# Altium PCB bangmach.PcbDoc
Units mm, origin at the board's own origin, x right, y up, seen from the top; angles counter-clockwise.
Board outline 112.01 x 94.64 mm, 2 copper layers (Top Layer, Bottom Layer), stack 1.535 mm thick; 50 components, 66 nets, 240 pads, 149 vias.
Unrouted connection lines stored in the file: 4.
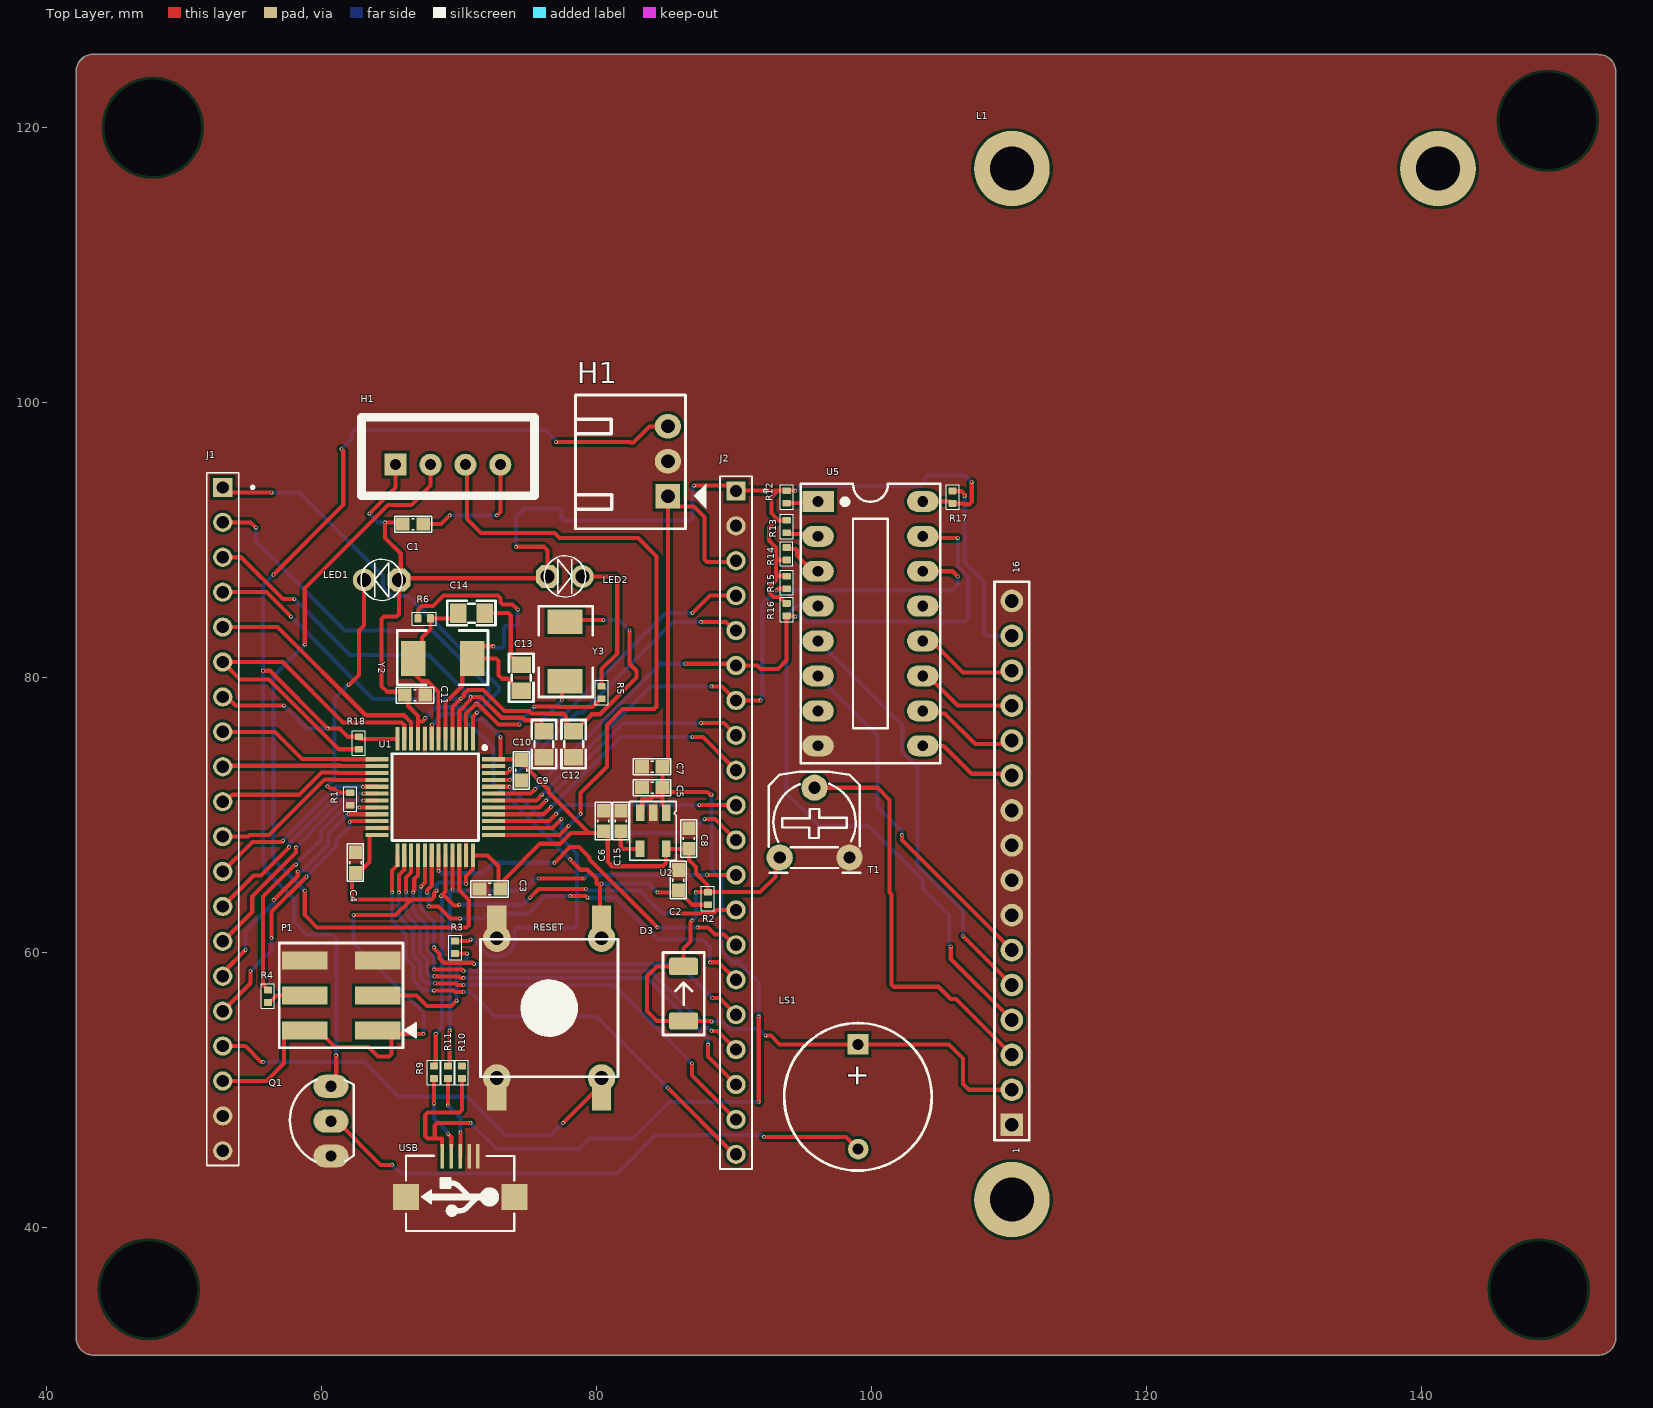
[diagram p0: Top Layer view]
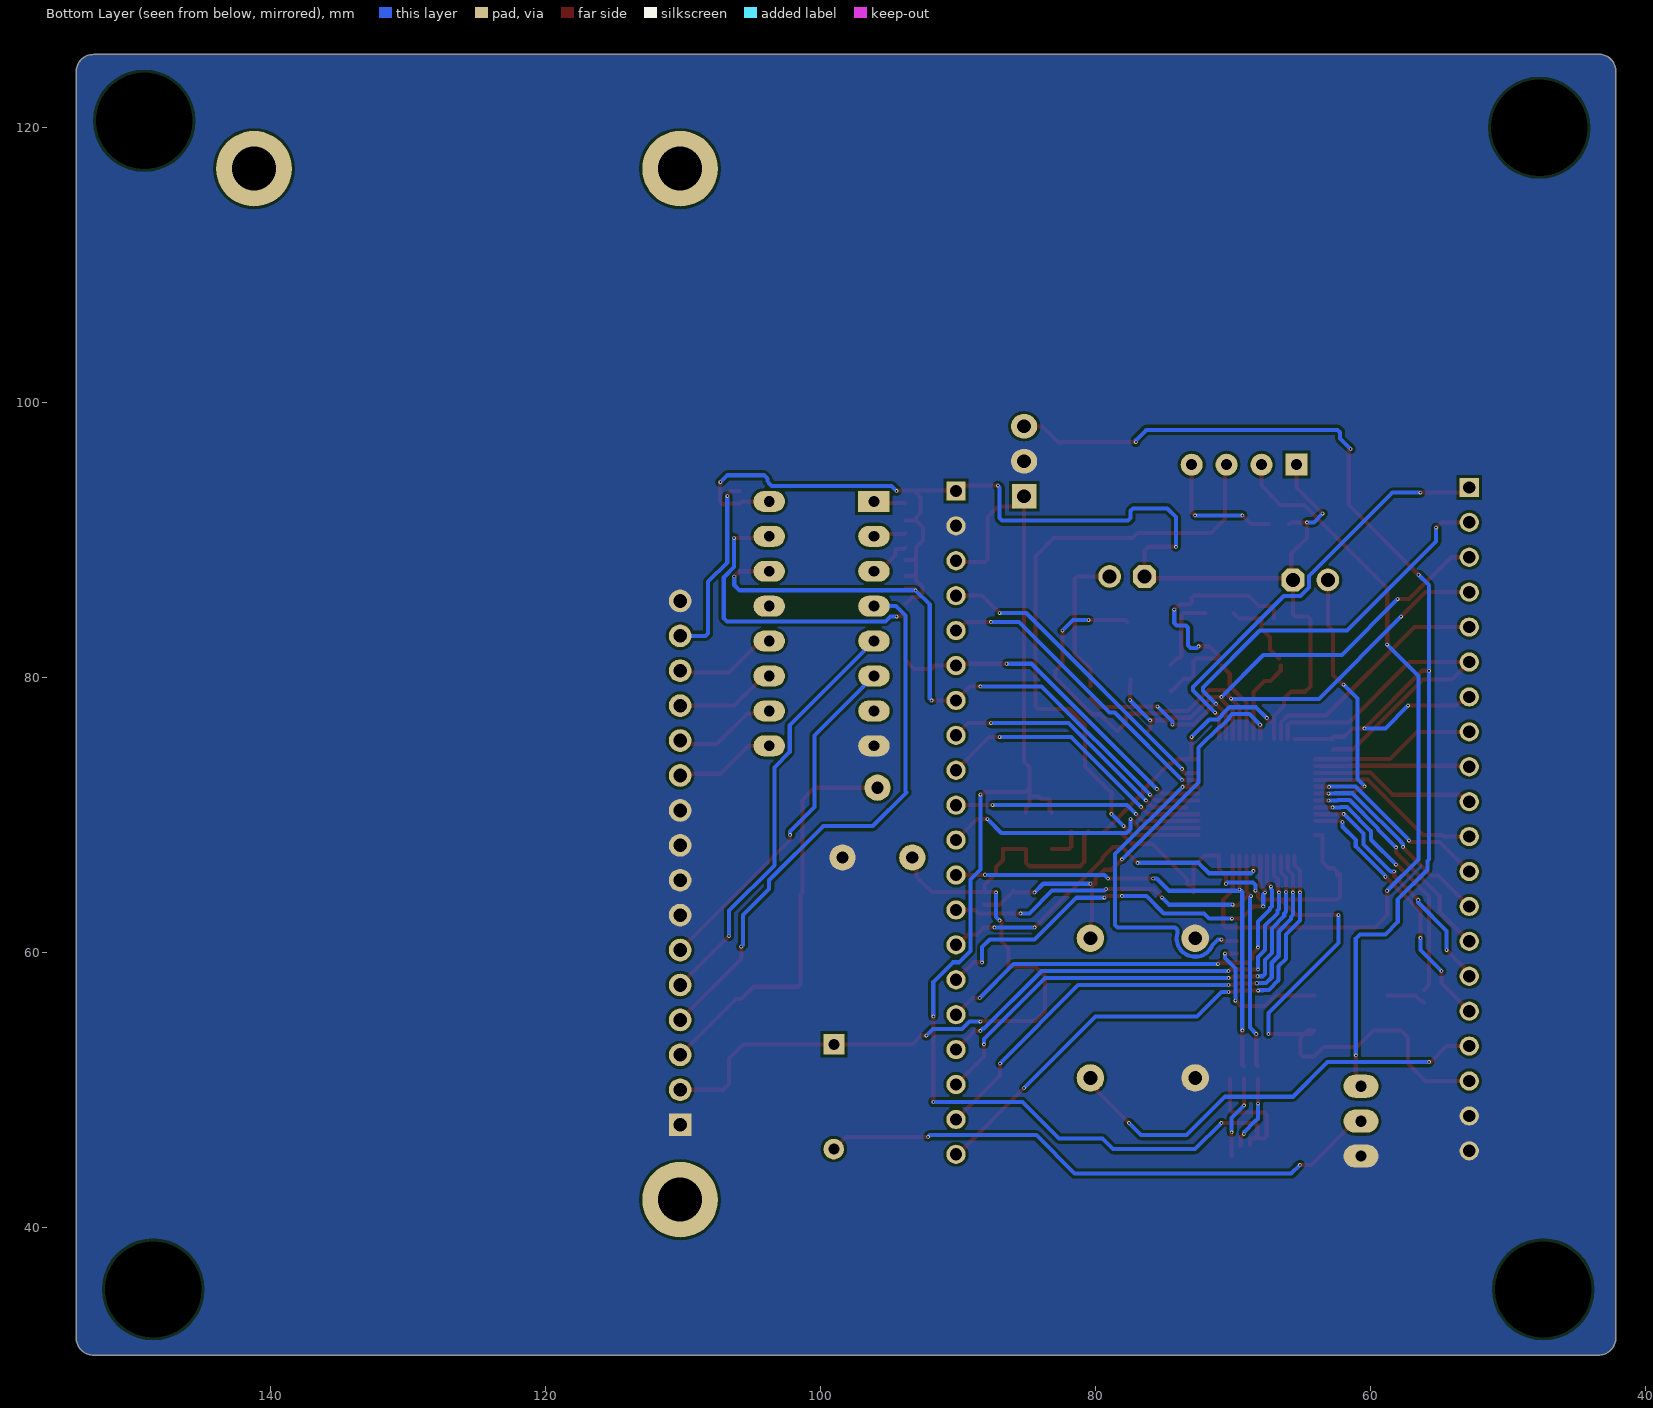
[diagram p1: Bottom Layer view, seen from below]
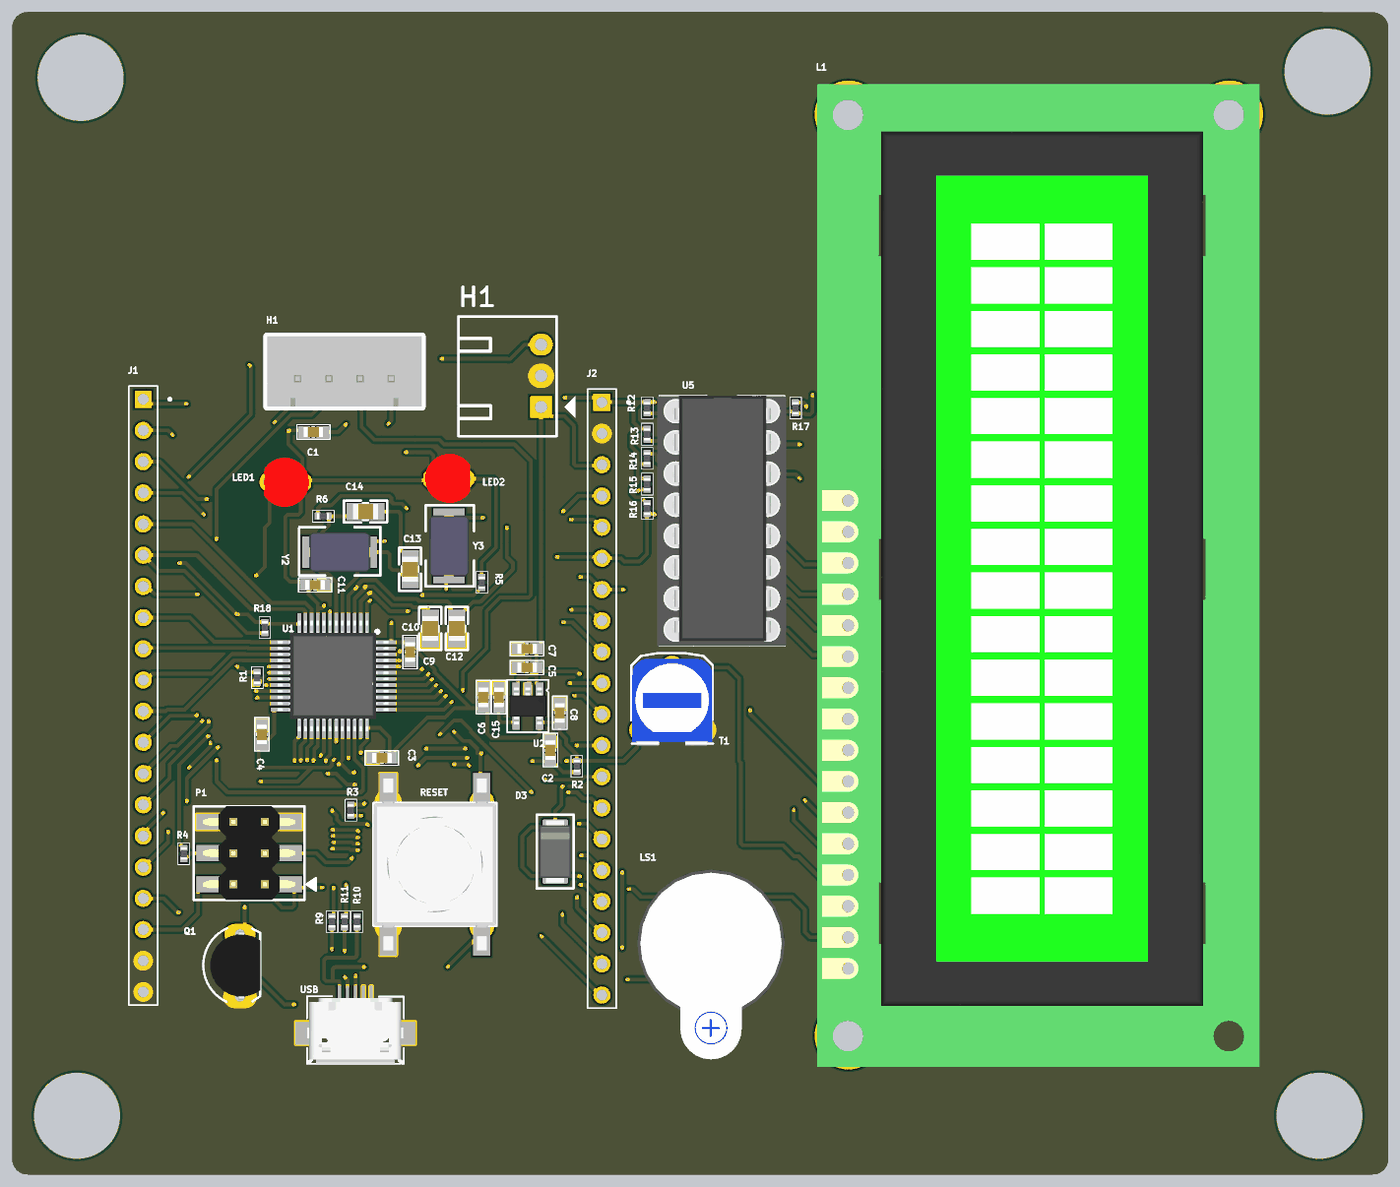
[diagram p2: 3D render of the assembled board from above, using the file's embedded part models]

## Layer stack, top to bottom
Top Solder: solder mask 0.0254, SM-001, Dk 4
Top Layer: signal copper 0.035
Dielectric 1: core 1.465, Core-043, Dk 4.3
Bottom Layer: signal copper 0.035
Bottom Solder: solder mask 0.0254, SM-001, Dk 4

## Board outline
42.164,32.004 ccw(c43.434,32.004) 43.434,30.734 152.908,30.734 ccw(c152.908,32.004) 154.178,32.004 154.178,124.079 ccw(c152.908,124.079) 152.908,125.349 148.844,125.349 ccw(c148.816,125.349) 148.816,125.377 43.434,125.377 ccw(c43.434,124.107) 42.164,124.107

## Design rules (kind name [scope] priority, off if disabled: settings)
Clearance [All] p1: gap=0.2 ignorepadtopadclearanceinfootprint=FALSE
PlaneConnect [All] p1: planeconnectstyle=Direct reliefexpansion=0.508 reliefentries=4 reliefconductorwidth=0.254 reliefairgap=0.254
PolygonConnect [All] p1: connectstyle=Direct reliefconductorwidth=0.254 reliefentries=4 polygonreliefangle="90 Angle" airgapwidth=0.254
RoomDefinition schematic [InComponentClass('schematic')] p1: confinementstyle=ConfineIn formatcopy=TRUE lockcomponents=FALSE outline 0,0 50.8,0 50.8,25.4 0,25.4
RoutingVias [All] p1: holewidth=0.15 width=0.25 viastyle="Through Hole" minholewidth=0.15 minwidth=0.25 maxholewidth=0.15 maxwidth=0.25
ShortCircuit [All] p1: allowed=TRUE
SolderMaskExpansion [All] p1: expansion=0.102 istentingtop=FALSE
UnRoutedNet [All] p1: checkbadconnections=TRUE
Width [All] p1: maxlimit=1 minlimit=0.3 preferedwidth=0.4 minimp=50.000000 maximp=50.000000 favimp=50.000000
27 further rules are at their usual default settings.

## Components (designator, comment, footprint, x,y, rotation, side; value= is the part's Value field where it differs from the comment)
C1 "104" "tu 0603" 66.675,91.186 r0 top
C2 "105" "tu 0603" 85.979,65.278 r90 top
C3 "104" "tu 0603" 72.263,64.643 r180 top
C4 "104" "tu 0603" 62.484,66.56 r90 top
C5 "105" "tu 0603" 84.074,72.009 r180 top
C6 "106" "tu 0603" 80.518,69.584 r90 top
C7 "104" "tu 0603" 84.074,73.533 r180 top
C8 "104" "tu 0603" 86.741,68.314 r90 top
C9 "20pF" "tu 0805" 76.2,75.184 r270 top
C10 "104" "tu 0603" 74.549,73.279 r270 top
C11 "104" "tu 0603" 66.814,78.74 r0 top
C12 "20pF" "tu 0805" 78.359,75.184 r270 top
C13 "20p" "tu 0805" 74.549,80.01 r90 top
C14 "20p" "tu 0805" 70.923,84.712 r0 top
C15 "223" "tu 0603" 81.788,69.584 r90 top
D3 "1N4007" "DO-214AC-2 (SMA)" 86.36,57.023 r90 top
H1 "IR Sensor" "Header 3P DC 2.54" 85.217,93.218 r180 top
H1 "SWD" XH2.54M-4 65.405,95.504 r0 top
J1 "2-87220-0" TE_2-87220-0 52.832,69.723 r270 top
J2 "2-87220-0" TE_2-87220-0 90.17,69.469 r270 top
L1 "LCD16x2" "LCD16X2_3 HOLES" 107.696,39.498 r90 top
LED1 "LED 3mm" LED-3MM-RED 65.659,87.122 r180 top
LED2 "LED 3mm" LED-3MM-RED 76.454,87.376 r0 top
LS1 "Coi báo" "Coi Chip Speacker" 99.047,53.34 r270 top
P1 "95278-101A06LF" HDR_M_2X3_2.54_SMD 61.451,56.896 r90 top
Q1 "C1815" TO92 60.706,47.752 r90 top value=C9014
R1 "510" "RES 0402" 62.103,71.194 r270 top
R2 "10k" "RES 0402" 88.138,63.955 r90 top
R3 "100k" "RES 0402" 69.723,60.399 r270 top
R4 "100k" "RES 0402" 56.134,56.843 r90 top
R5 "510" "RES 0402" 80.391,78.941 r270 top
R6 "1M" "RES 0402" 67.49,84.328 r180 top
R9 "20" "RES 0402" 68.199,51.308 r90 top
R10 "4.7K" "RES 0402" 70.231,51.308 r90 top
R11 "20" "RES 0402" 69.215,51.308 r90 top
R12 "10K" "RES 0402" 93.853,93.165 r270 top
R13 "10K" "RES 0402" 93.853,91.006 r270 top
R14 "10K" "RES 0402" 93.853,89.027 r90 top
R15 "10K" "RES 0402" 93.853,86.942 r270 top
R16 "10K" "RES 0402" 93.853,84.963 r270 top
R17 "330" "RES 0402" 105.918,93.144 r270 top
R18 "4.7K" "RES 0402" 62.738,75.258 r90 top
RESET "5ESH935" SW_5ESH935 76.581,55.98 r0 top
T1 "10K" "Bien Tro Tam Giac Dung" 93.345,66.929 r0 top
U1 "STM32F103C8T6" LQFP-48_19.6_393_58X11_SMD 68.29,71.327 r270 top
U2 "RT9193-33GB" SOT23-5 84.137,68.874 r180 top
U5 "PCF8574" DIP16 96.139,92.837 r270 top
USB "USB Micro 5p SMD" "USB Micro 5p SMD" 70.104,45.212 r180 top
Y2 "8Mhz" "Thach Anh 2 chan SMD5032" 68.834,81.407 r0 top value=4Mhz
Y3 "32.768K" "Thach Anh 2 chan SMD5032" 77.724,81.915 r270 top value=4Mhz

## Footprints (in the part's own frame and the unit in brackets; to place one, negate y for a bottom-side part, rotate by r counter-clockwise, add the part's x,y. Pads: shape width x height; smd on the part's side, far side on the other; paste and mask are expansions set on the pad)
"Bien Tro Tam Giac Dung" [mil] "RM065"
  round 75 hole 35: 1(0,0) 2(100,200) 3(200,0)
  silkscreen extent -31,-44 231,246, body extent -28,-50 228,228, height 279
"Coi Chip Speacker" [mm]
  rect 1.5x1.5 hole 0.8: 1(0,0)
  round 1.5 hole 0.8: 2(7.62,0.013)
  silkscreen extent -1.55,-5.38 9.18,5.36, body extent -2.22,-6 13.24,6, height 4.5
DIP16 [mil] "16 PIN, W 300mil, Pin to pin 100mil"
  rect 60x90 hole 31: 1(0,0)
  oval 60x90 hole 31: 2(100,0) 3(200,0) 4(300,0) 5(400,0) 6(500,0) 7(600,0) 8(700,0) 9(700,300) 10(600,300) 11(500,300) 12(400,300) 13(300,300) 14(200,300) 15(100,300) 16(0,300)
  silkscreen extent -50,-50 750,350, body extent -52,-57 752,356, height 299
"DO-214AC-2 (SMA)" [mm]
  rrect25% 1.27x2.1 smd: A(-1.985,0) K(1.985,0)
  silkscreen extent -3,-1.5 3,1.5, body extent -2.6,-1.3 2.6,1.3, height 2.42
HDR_M_2X3_2.54_SMD [mm]
  rect 1.3x3.3 smd: 1(-2.54,-2.65) 2(-2.54,2.65) 3(0,-2.65) 4(0,2.65) 5(2.54,-2.65) 6(2.54,2.65)
  silkscreen extent -3.81,-5.43 3.81,4.5, body extent -3.81,-3.75 3.81,3.75, height 9.75
"Header 3P DC 2.54" [mil]
  rect 70x70 hole 39.37 unplated: 1(0,0)
  oval 75x70 hole 39.37 unplated: 2(0,-100) 3(0,-200)
  silkscreen extent -110,-290 265,93
"LCD16X2_3 HOLES" [mm] "LCD 16x2"
  rect 1.65x1.65 hole 1: 1(8,-2.54)
  round 1.65 hole 1: 2(10.54,-2.54) 3(13.08,-2.54) 4(15.62,-2.54) 5(18.16,-2.54) 6(20.7,-2.54) 7(23.24,-2.54) 8(25.78,-2.54) 9(28.32,-2.54) 10(30.86,-2.54) 11(33.4,-2.54) 12(35.94,-2.54) 13(38.48,-2.54) 14(41.02,-2.54) 15(43.56,-2.54) 16(46.1,-2.54)
  round 5.5 hole 3.2 paste+0: ""(2.54,-2.54) ""(77.54,-2.54)
  round 5.5 hole 3.2: ""(77.54,-33.54)
  silkscreen extent 6.86,-3.81 47.5,-1.27, body extent 0,-36 80,0, height 17
LED-3MM-RED [mil]
  oct 65x65 hole 40: 1(0,0)
  round 65 hole 40: 2(100,0)
  silkscreen extent -9,-59 109,59, body extent -27,-77 117,80, height 181
LQFP-48_19.6_393_58X11_SMD [mm] "48LQFP"
  rect 1.7x0.3 smd mask+0.076: 1(-4.238,2.75) 2(-4.238,2.25) 3(-4.238,1.75) 4(-4.238,1.25) 5(-4.238,0.75) 6(-4.238,0.25) 7(-4.238,-0.25) 8(-4.238,-0.75) 9(-4.238,-1.25) 10(-4.238,-1.75) 11(-4.238,-2.25) 12(-4.238,-2.75) 25(4.238,-2.75) 26(4.238,-2.25) 27(4.238,-1.75) 28(4.238,-1.25) 29(4.238,-0.75) 30(4.238,-0.25) 31(4.238,0.25) 32(4.238,0.75) 33(4.238,1.25) 34(4.238,1.75) 35(4.238,2.25) 36(4.238,2.75)
  rect 0.3x1.7 smd mask+0.076: 13(-2.75,-4.238) 14(-2.25,-4.238) 15(-1.75,-4.238) 16(-1.25,-4.238) 17(-0.75,-4.238) 18(-0.25,-4.238) 19(0.25,-4.238) 20(0.75,-4.238) 21(1.25,-4.238) 22(1.75,-4.238) 23(2.25,-4.238) 24(2.75,-4.238) 37(2.75,4.238) 38(2.25,4.238) 39(1.75,4.238) 40(1.25,4.238) 41(0.75,4.238) 42(0.25,4.238) 43(-0.25,4.238) 44(-0.75,4.238) 45(-1.25,4.238) 46(-1.75,4.238) 47(-2.25,4.238) 48(-2.75,4.238)
  silkscreen extent -3.72,-3.15 3.15,3.73, body extent -4.5,-4.5 4.5,4.5, height 1.7
"RES 0402" [mm]
  rrect20% 0.49x0.6 smd: 1(-0.455,0) 2(0.455,0)
  silkscreen extent -0.89,-0.46 0.89,0.48, body extent -0.47,-0.25 0.53,0.25, height 0.32
SOT23-5 [mm] "CASE: SOT"
  rect 0.62x1.22 smd mask+0.076: 1(-0.953,-1.31) 2(-0.003,-1.31) 3(0.947,-1.31) 4(0.952,1.31) 5(-0.953,1.31)
  silkscreen extent -1.69,-2.14 1.69,2.14, body extent -1.5,-1.5 1.5,1.5, height 1.41
SW_5ESH935 [mm]
  rect 1.4x2.4 smd: 1(-3.81,6.25) 2(-3.81,-6.25) 3(3.81,6.25) 4(3.81,-6.25)
  round 2 hole 1: 1(-3.81,5.08) 2(-3.81,-5.08) 3(3.81,5.08) 4(3.81,-5.08)
  silkscreen extent -5,-5 5,5, body extent -5,-7 5,7, height 6.37
TE_2-87220-0 [mm]
  rect 1.398x1.398 hole 0.89: 1(-24.13,0)
  round 1.398 hole 0.89: 2(-21.59,0) 3(-19.05,0) 4(-16.51,0) 5(-13.97,0) 6(-11.43,0) 7(-8.89,0) 8(-6.35,0) 9(-3.81,0) 10(-1.27,0) 11(1.27,0) 12(3.81,0) 13(6.35,0) 14(8.89,0) 15(11.43,0) 16(13.97,0) 17(16.51,0) 18(19.05,0) 19(21.59,0) 20(24.13,0)
  silkscreen extent -25.2,-1.17 25.2,2.27
"Thach Anh 2 chan SMD5032" [mil] "DO-214-AA/SMB; 2 C-Bend Leads; Body 5.3 x 3.6 mm, inc. leads (LxW)"
  rect 70x100 smd: 1(-85,0) 2(85,0)
  silkscreen extent -130,-75 130,80, body extent -98,-63 98,63, height 51
TO92 [mil] "TO-92"
  oval 66x100 hole 32: 1(-100,0) 2(0,0) 3(100,0)
  silkscreen extent -117,-65 120,118, body extent -109,-66 109,95, height 245
"tu 0603" [mm] "Chip Capacitor, 2-Leads, Body 1,60x0,80mm, IPC Medium Density"
  rect 1x0.95 smd mask+0.076: 1(-0.75,0) 2(0.75,0)
  silkscreen extent -1.35,-0.58 1.37,0.58, body extent -0.8,-0.4 0.8,0.4, height 0.9
"tu 0805" [mm] "Compoment SMD 80x50mil"
  rect 1.2x1.4 smd: 1(-0.946,-0.003) 2(0.954,-0.003)
  silkscreen extent -1.75,-0.89 1.75,0.89, body extent -1.01,-0.64 1.01,0.63, height 0.61
"USB Micro 5p SMD" [mil]
  rect 10x70 smd: 1(51.18,0) 2(25.59,0) 3(0,0) 4(-25.59,0) 5(-50,0)
  rect 74.8x74.8 smd: 5(-155.51,116.84) 5(155.51,116.84)
  silkscreen extent -155,-1 155,215, body extent -157,5 158,218, height 107
XH2.54M-4 [mm]
  rect 1.6x1.6 hole 0.8: 1(0,0)
  round 1.6 hole 0.8: 2(2.54,0) 3(5.08,0) 4(7.62,0)
  silkscreen extent -2.48,-2.26 10.1,3.46, body extent -2.48,-2.26 10.1,3.48, height 6.91

## Part data
C1 C2 C5 C6 C7 C8 C9 C12 C13 C14 C15: library part "Tu 0402 220nF 6.3V 20%", "Dán", Chung_Loai=Dán, Don_Vi=Con, Ma_Hang=MH008102, So_Chan=2, Ten_Linh_Kien="Tụ 0402 220nF 6.3V 20%"
C3 C4 C10 C11: library part "Tu 0603 104 50V 10%", "Dán", Chung_Loai=Dán, Don_Vi=Con, Ma_Hang=MH004568, So_Chan=2, Ten_Linh_Kien="Tụ 0603 104-100nF 10% 50V"
D3: library part D_SMA, "Diode SMD SMA (DO-214AA)"
H1: library part "Header 3P 2.54 Duc Cong", "Cắm", Chung_Loai=Cắm, Don_Vi=Con, Ma_Hang=MH001302, Ten_Linh_Kien="Header 3P XH2.54-3P Đực Cong"
H1: library part "Header 4P 2.54 Duc Thang", "Cắm", Chung_Loai=Cắm, Don_Vi=Con, Ma_Hang=MH001285, Ten_Linh_Kien="Header 4P XH2.54-4P Đực Thẳng"
J1 J2: Package=None, Availability=Warning, Centerline_Pitch="2.54 mm[.1 in]", EU_RoHS_Compliance=Compliant, MF="TE Connectivity", MP=2-87220-0, Number_of_Positions=20, Price=None, Product_Type=Connector, Purchase-URL=https://pricing.snapeda.com/search/part/2-87220-0/?ref=eda, SnapEDA_Link=https://www.snapeda.com/parts/2-87220-0/TE%20Connectivity%20AMP%20Connectors/view-part/397035/?ref=snap
L1: "Character LCD 16x2"
LED1 LED2: library part "LED 3mm Do", "Cắm", Chung_Loai=Cắm, Don_Vi=Con, Ma_Hang=MH003892, Ten_Linh_Kien="Led 3MM Phủ Đỏ (10c)"
LS1: library part "Coi Chip Speaker", "Còi chip"
P1: library part HDR_M_95278-101A06LF, "BERGSTIK HDR 6POS .100\" DR SMT", Current Rating=-, Insulation Color=Black, Manufacturer="Amphenol FCI", Material Flammability Rating="UL94 V-0", Supplier Part Number 1=609-3487-6-ND, Applications=-, Category="Connectors, Interconnects", ComponentLink1Description=http://cdn.amphenol-icc.com/media/wysiwyg/files/drawing/95278.pdf, ComponentLink1URL=http://cdn.amphenol-icc.com/media/wysiwyg/files/drawing/95278.pdf, Connector Type=Header, Contact Finish - Mating="Gold, GXT™", Contact Finish - Post=Tin, Contact Finish Thickness - Mating="30µin (0.76µm)", Contact Finish Thickness - Post="78.7µin (2.00µm)", Contact Length - Mating="0.232\" (5.90mm)", Contact Length - Post=-, Contact Material="Phosphor Bronze", Contact Shape=Square, Contact Type="Male Pin", Fastening Type=Push-Pull, Features="Pick and Place", Ingress Protection=-, Insulation Height="0.100\" (2.54mm)", Insulation Material=Thermoplastic, Manufacturer Part Number=95278-101A06LF, Mated Stacking Heights=-, Mounting Type="Surface Mount", Number of Positions=6, Number of Positions Loaded=All, Number of Rows=2, Operating Temperature=-, Overall Contact Length=-, Packaging=Digi-Reel®, Part Status=Active, Pitch - Mating="0.100\" (2.54mm)", Pricing 1="1=1.09, 10=0.96, 100=0.8284 (USD)", RoHS="RoHS Compliant", Row Spacing - Mating="0.100\" (2.54mm)", Shrouding=Unshrouded, Stock 1=11648, Style="Board to Board", Supplier 1=Digi-Key, Termination=Solder, Voltage Rating=-
Q1: library part "Trans C1815 DIP", "NPN transistor"
R1 R3 R4 R5 R6 R9 R10 R11 R12 R13 R14 R15 R16 R17 R18: library part "RES 0402", "RES SMD 0402", Manufacturer="Vishay Dale", Manufacturer Part Number=CRCW040210K0FKED, Operating Temperature="-55°C ~ 155°C", Package / Case="0402 (1005 Metric)", Power (Watts)="0.063W, 1/16W", Resistance (Ohms)=10k, Supplier Part Number 1=541-10.0KLCT-ND, Temperature Coefficient=±100ppm/°C, Tolerance=±1%, Category=Resistors, ComponentLink1Description=http://www.vishay.com/docs/20035/dcrcwe3.pdf, ComponentLink1URL=http://www.vishay.com/docs/20035/dcrcwe3.pdf, Composition="Thick Film", Features="Automotive AEC-Q200", Height="0.016\" (0.40mm)", Number of Terminations=2, Packaging="Cut Tape (CT)", Pricing 1="10=0.083, 50=0.0444, 200=0.0255, 1000=0.0174 (USD)", RoHS="RoHS Compliant", Size / Dimension="0.039\" L x 0.020\" W (1.00mm x 0.50mm)", Stock 1=2392462, Supplier 1=Digi-Key, Supplier Device Package="0402 (1005 Metric)"
R2: library part "RES 0402", "RES SMD 0402", Manufacturer="Vishay Dale", Manufacturer Part Number=CRCW040210K0FKED, Operating Temperature="-55°C ~ 155°C", Package / Case="0402 (1005 Metric)", Power (Watts)="0.063W, 1/16W", Supplier Part Number 1=541-10.0KLCT-ND, Temperature Coefficient=±100ppm/°C, Tolerance=±1%, Category=Resistors, ComponentLink1Description=http://www.vishay.com/docs/20035/dcrcwe3.pdf, ComponentLink1URL=http://www.vishay.com/docs/20035/dcrcwe3.pdf, Composition="Thick Film", Features="Automotive AEC-Q200", Height="0.016\" (0.40mm)", Number of Terminations=2, Packaging="Cut Tape (CT)", Pricing 1="10=0.083, 50=0.0444, 200=0.0255, 1000=0.0174 (USD)", Resistance (Ohms)=10k, RoHS="RoHS Compliant", Size / Dimension="0.039\" L x 0.020\" W (1.00mm x 0.50mm)", Stock 1=2392462, Supplier 1=Digi-Key, Supplier Device Package="0402 (1005 Metric)"
RESET: library part SW_5ESH935, "SWITCH TACTILE SPST-NO 0.05A 24V", Contact Rating @ Voltage="0.05A @ 24VDC", Illumination Type, Color=-, Manufacturer 1="MEC Switches", Operating Force=350gf, Operating Temperature="-40°C ~ 160°C", Supplier Part Number 1=679-2579-ND, Actuator Height off PCB, Vertical=6.40mm, Actuator Length, Right Angle=-, Actuator Material="Polyphenylene Sulfide (PPS)", Actuator Orientation="Top Actuated", Actuator Type="Plunger for Cap", Category 1=Switches, Circuit=SPST-NO, ComponentLink1Description=http://www.mec.dk/files/MEC/brochures/MEC_ProductCatalogueno7_multimec-5-series-switches.pdf, ComponentLink1URL=http://www.mec.dk/files/MEC/brochures/MEC_ProductCatalogueno7_multimec-5-series-switches.pdf, Description 1="SWITCH TACTILE SPST-NO 0.05A 24V", Features="Sealed - Flux Protection", Illumination=Non-Illuminated, Illumination Voltage (Nominal)=-, Ingress Protection="IP67 - Dust Tight, Waterproof", Manufacturer Part Number 1=5ESH935, Mechanical Life="10,000,000 Cycles", Mounting Type="Surface Mount", Outline="10.10mm x 10.10mm", Packaging=Tube, Part Status=Active, Pricing 1="1=2.68, 10=2.575, 25=2.3692, 50=2.06, 100=1.957, 250=1.90552, 500=1.854, 1000=1.442, 5000=1.339 (USD)", RoHS 1="RoHS Compliant", Stock 1=0, Supplier 1=Digi-Key, Switch Function=Off-Mom, Switch Travel=1.00mm, Termination Style="Gull Wing"
T1: library part "Bien tro tam giac 100K Dung", "Cắm", Chung_Loai=Cắm, Don_Vi=Con, Ma_Hang=MH003711, Ten_Linh_Kien="Biến Trở Tam Giác 104-100K RM065"
U1: library part IC_STM32F103C8T6, "ARM® Cortex®-M3 STM32F1 Microcontroller IC 32-Bit 72MHz 64KB (64K x 8) FLASH 48-LQFP (7x7)", Alternate Part Number-1=NA, Case/Package=LQFP48, Manufacturer=STMicroelectronics, Manufacturer Part Number=STM32F103C8T6, Supplier Part Number-1=STM32F103C8T6, Supplier-1=LCSC
U2: library part REG_5.5V-3.3V-0.3A-1W-SOT-23-5, "Linear Voltage Regulator IC 1 Output 300mA SOT-23-5", Alternate Part Number-1=NA, Case/Package=SOT-23-5, Manufacturer="Richtek USA Inc.", Supplier Part Number-1=C15651, Manufacturer Part Number=RT9193-33GB, Supplier-1=LCSC
U5: "I2C PORT EXPANDER", Frequency - Clock=100KHz, Manufacturer="NXP Semiconductors", Manufacturer Part Number=PCF8574T/3,512, Operating Temperature="-40°C ~ 85°C", Package / Case="16-SOIC (7.5mm Width)", Supplier Part Number=568-1076-5-ND, Voltage - Supply="2.5 V ~ 6 V", Category="Integrated Circuits (ICs)", Includes=POR, Interface=I²C, Interrupt Output=Yes, Number of I /O=8, Packaging=Tube, RoHS="RoHS Compliant", Supplier=Digi-Key, Supplier 1=Digi-Key, Supplier Part Number 1=568-1076-5-ND
USB: "USB Type B", Ma_Hang=MH001020, Ten="MicroUSB MK5P SMD"
Y2 Y3: library part "Thach Anh 2 chan SMD 5032", "Crystal For all Crystal 2pin."

## Free pads (board coordinates)
  round 1.524 hole 7: 1(47.444,35.513) 1(47.737,120.012) 1(148.571,35.513) 1(149.225,120.523)

## Via types
v1: diameter 0.25, hole 0.15, Top Layer to Bottom Layer, 149 vias

## Nets (pads, with @x,y where several pads share a name; then routed paths per layer and width w, separated by ;. In a path a pad name is that pad's centre, name@x,y a point inside that pad or via, vN(x,y) a via of type N, cw(c..) or ccw(c..) an arc to the next point about the centre after c; other vN are vias at no path point)
5V: C5.1 C7.1 H1.1@85.217,93.218 J2.3 R10.1 U2.1 U2.3 USB.1 | length 97.7
  Top Layer w0.3: USB.1@68.791,46.021 68.791,46.459 68.768,46.482 68.254,46.482 ; R10.1 70.231,48.563 70.055,48.387 67.74,48.387 67.564,48.211 67.564,46.658 67.74,46.482 68.254,46.482 ; v1(70.866,47.625) 68.43,47.625 68.254,47.449 68.254,46.482 ; U2.3 83.35,70.344 83.35,71.173 83.361,71.184 83.969,71.184 84.164,71.38 84.824,71.38 ; U2.1 85.09,70.484 84.824,70.75 84.824,71.38 ; v1(88.392,71.501) 88.265,71.501 88.082,71.684 85.149,71.684 C5.1 ; J2.3 90.086,88.435 88.06,88.435 87.884,88.611 87.884,91.694 87.099,92.479 85.956,92.479 85.217,93.218 85.217,74.034 85.174,73.991 85.174,73.858 84.849,73.533 C7.1 C5.1 ; v1(91.821,49.149) v1(91.821,55.372) ; 84.824,71.38 C5.1
  Bottom Layer w0.3: v1(70.866,47.625) 72.771,45.72 78.74,45.72 79.502,46.482 82.677,46.482 85.344,49.149 v1(91.821,49.149) ; v1(88.392,71.501) 88.392,66.057 89.121,65.328 89.121,60.144 89.956,59.309 90.384,59.309 91.821,57.872 v1(91.821,55.372)
BOOT0: R3.1 U1.44 | length 24.3
  Top Layer w0.3: R3.1 70.76,60.854 v1(70.866,60.96) ; U1.44 v1(73.681,72.077)
  Bottom Layer w0.3: v1(70.866,60.96) 71.12,60.96 71.515,60.565 ccw(c72.771,61.06) 74.06,61.461 cw(c74.347,61.549) 74.249,61.833 74.297,61.849 78.429,61.849 78.517,61.937 78.605,62.025 78.605,67.174 73.702,72.077 v1(73.681,72.077)
BOOT1: R4.2 U1.20 | length 18.3
  Top Layer w0.3: R4.2 56.079,57.298 55.984,57.393 55.984,57.448 55.753,57.679 55.753,64.08 58.094,66.421 v1(58.166,66.421) ; v1(62.774,70.576) 62.775,70.577 U1.20
  Bottom Layer w0.3: v1(58.166,66.421) 59.967,68.222 59.967,68.838 61.734,70.604 62.183,70.604 62.211,70.576 v1(62.774,70.576)
D0: C2.2 C3.2 C4.2 C5.2 C6.2 C7.2 C8.2 C9.2 C10.2 C11.2 C12.2 C15.2 H1.2@85.217,95.758 J1.19 J1.20 J2.2 L1.1 L1.7 L1.8 L1.9 L1.10 L1.16 P1.5 P1.6 Q1.1 R1.2 RESET.1 RESET.2 T1.3 U1.8 U1.23 U1.35 U1.47 U2.2 U5.8 USB.4 USB.5
D4: L1.11 U5.9 | length 7.4
  Top Layer w0.3: U5.9 105.283,75.057 107.315,73.025 110.109,73.025 L1.11
D5: L1.12 U5.10 | length 7.6
  Top Layer w0.3: U5.10 103.955,77.401 105.352,77.401 107.572,75.181 109.979,75.181 L1.12
D6: L1.13 U5.11 | length 7.4
  Top Layer w0.3: U5.11 104.14,80.137 106.299,77.978 L1.13
D7: L1.14 U5.12 | length 7.5
  Top Layer w0.3: U5.12 104.394,82.677 106.68,80.391 110.109,80.391 L1.14
E: L1.6 U5.6 | length 25.8
  Top Layer w0.3: v1(102.235,68.58) 102.235,68.199 L1.6
  Bottom Layer w0.3: U5.6 96.189,80.137 96.754,79.572 96.754,79.522 100.457,75.819 100.457,70.612 102.235,68.834 v1(102.235,68.58)
LED+: L1.15 R17.1 | length 13.8
  Top Layer w0.3: R17.1 106.553,93.599 106.807,93.345 v1(106.807,93.218)
  Bottom Layer w0.3: v1(106.807,93.218) 106.807,88.392 108.204,86.995 108.204,83.234 108.38,83.058 L1.15
NetC13_2: C13.2 C14.2 | length 5.8
  Top Layer w0.3: C14.2@72.009,84.709 73.611,84.709 73.787,84.533 73.787,81.59 73.963,81.414 74.102,81.414 C13.2
NetC15_1: C15.1 U2.4 | length 2.6
  Top Layer w0.3: C15.1 81.788,67.74 81.964,67.564 U2.4
NetLED1_2: LED1.2 R1.1 | length 17.8
  Top Layer w0.3: v1(60.44,72.104) 60.489,72.104 60.643,71.95 60.938,71.95 61.239,71.649 R1.1 ; v1(61.976,79.502) 62.039,79.502 62.738,80.2 62.738,83.439 63.119,83.82 LED1.2
  Bottom Layer w0.3: 60.55,72.248 60.96,72.659 60.96,78.486 v1(61.976,79.502)
NetLED2_2: LED2.2 R5.1 | length 10.9
  Top Layer w0.3: LED2.2 81.358,87.376 81.534,87.2 81.534,81.788 80.391,80.645 R5.1
NetLS1_2: LS1.2 Q1.2 | length 41.5
  Top Layer w0.3: Q1.2 61.138,47.752 64.313,44.577 v1(65.151,44.577) ; v1(92.202,46.609) 98.171,46.609 LS1.2
  Bottom Layer w0.3: v1(65.151,44.577) 65.786,43.942 81.534,43.942 84.328,46.736 92.075,46.736 v1(92.202,46.609)
NetP1_3: P1.3 R3.2 | length 10.9
  Top Layer w0.3: P1.3 66.04,56.896 66.043,56.899 66.291,56.899 66.294,56.896 66.929,56.896 67.691,56.134 69.469,56.134 v1(69.85,56.515) ; R3.2 v1(70.612,59.944)
  Bottom Layer w0.3: v1(69.85,56.515) 69.842,56.523 69.842,58.865 70.612,59.635 v1(70.612,59.944)
NetP1_4: P1.4 R4.1 | length 2.9
  Top Layer w0.3: R4.1 56.229,56.483 56.33,56.483 56.743,56.896 P1.4
NetQ1_3: H1.3@85.217,98.298 J1.7 Q1.3 R18.2 U1.12 | length 98.1
  Top Layer w0.3: J1.7 53.129,78.613 53.764,77.978 v1(57.277,77.978) ; v1(55.753,80.518) 56.269,80.518 v1(60.46,76.327) 61.341,76.327 61.955,75.713 R18.2 ; v1(56.515,87.503) 61.595,92.583 61.595,96.52 v1(61.468,96.647) ; Q1.3 61.087,50.673 v1(61.087,52.545) ; R18.2@62.803,75.565 U1.12 ; v1(77.089,97.155) 82.425,97.155 82.458,97.122 82.706,97.122 83.882,98.298 H1.3@85.217,98.298
  Bottom Layer w0.3: v1(56.515,87.503) 55.753,86.741 v1(55.753,80.518) 55.753,66.802 55.88,66.675 55.88,66.04 58.039,63.881 58.039,62.23 58.928,61.341 60.784,61.341 61.087,61.038 v1(61.087,52.545) ; v1(57.277,77.978) 58.928,76.327 v1(60.46,76.327) ; v1(61.468,96.647) 62.23,97.409 62.23,97.868 62.406,98.044 76.327,98.044 77.089,97.282 v1(77.089,97.155)
NetR9_1: R9.1 USB.2 | length 5.3
  Top Layer w0.3: v1(68.199,49.022) R9.1 ; v1(69.228,46.816) 69.454,46.59 USB.2@69.454,45.951
  Bottom Layer w0.3: v1(68.199,49.022) 68.199,47.928 68.375,47.752 68.419,47.752 69.228,46.943
NetR11_1: R11.1 USB.3 | length 5.9
  Top Layer w0.3: v1(69.215,48.895) R11.1 ; USB.3 70.117,45.225 v1(70.117,46.943)
  Bottom Layer w0.3: v1(69.215,48.895) 70.117,47.993 70.117,47.07
NetR12_2: R12.2 U5.1 | length 2.3
  Top Layer w0.3: R12.2 96.012,92.71 U5.1
NetR13_2: R13.2 U5.2 | length 2.4
  Top Layer w0.3: R13.2 93.948,90.456 95.98,90.456 U5.2
NetR14_2: R14.2 U5.3 | length 3.2
  Top Layer w0.3: R14.2 93.948,89.387 94.509,89.387 94.614,89.282 94.614,88.901 95.758,87.757 U5.3
NRST: C2.1 J1.17 R2.1 RESET.3 RESET.4 U1.7 | length 64.6
  Top Layer w0.3: J1.17 54.483,53.213 55.626,52.07 v1(55.753,52.07) ; U1.7 v1(68.04,76.589) ; v1(77.597,47.625) 77.615,47.643 79.906,49.934 79.906,49.955 80.37,50.419 80.391,50.419 80.391,50.9 RESET.4@80.056,50.565 ; v1(78.105,66.802) 78.867,66.04 79.375,66.04 80.01,65.405 80.01,65.024 v1(80.391,65.024) ; 80.264,65.024 80.264,62.357 RESET.3@80.391,62.23 ; v1(84.455,64.389) 85.84,64.389 C2.1 85.979,64.503 86.982,63.5 R2.1
  Bottom Layer w0.3: v1(55.753,52.07) 55.778,52.045 63.144,52.045 65.659,49.53 70.358,49.53 70.361,49.533 70.609,49.533 70.738,49.404 73.406,46.736 76.708,46.736 v1(77.597,47.625) ; v1(68.04,76.589) 68.81,77.359 70.088,77.359 70.32,77.127 70.32,77.056 70.905,76.47 70.977,76.47 72.528,74.919 72.528,72.379 v1(78.105,66.802) ; v1(80.391,65.024) 83.82,65.024 v1(84.455,64.389)
OSCIN: C13.1 R6.2 U1.5 Y2.2 | length 26.4
  Top Layer w0.3: R6.2 67.035,84.942 67.31,85.217 68.136,85.217 68.898,85.979 72.849,85.979 73.025,85.803 73.025,85.52 73.201,85.344 73.914,85.344 v1(74.295,84.963) ; U1.5 69.04,78.201 70.254,79.415 70.254,80.287 Y2.2@70.866,80.899 ; v1(72.517,82.296) 71.732,82.296 70.993,81.557 Y2.2 72.722,81.407 72.898,81.231 72.898,80.186 73.145,79.939 73.578,79.939 74.452,79.064 C13.1
  Bottom Layer w0.3: v1(72.517,82.296) 72.644,82.169 73.103,82.169 73.279,82.345 73.279,83.644 73.455,83.82 74.119,83.82 74.295,83.996 v1(74.295,84.963)
OSCOUT: C14.1 R6.1 U1.6 Y2.1 | length 12.1
  Top Layer w0.3: Y2.1@66.548,80.899 66.548,80.518 67.287,79.779 67.729,79.779 68.54,78.968 68.54,78.261 U1.6 ; Y2.1 67.328,82.06 67.328,82.949 67.945,83.566 R6.1 69.596,84.328 C14.1
OUT: 
PA0: J1.5 U1.10 | length 17.8
  Top Layer w0.3: J1.5 56.824,83.693 63.237,77.28 66.027,77.28 66.54,76.767 66.54,76.541 U1.10
PA1: J1.6 R18.1 U1.11 | length 28.6
  Top Layer w0.3: R18.1 61.277,74.803 56.197,79.883 54.102,79.883 J1.6 57.198,81.153 61.586,76.765 65.835,76.765 66.04,76.56 U1.11
PA3: J1.8 U1.13 | length 12
  Top Layer w0.3: J1.8 56.642,76.073 58.611,74.104 61.571,74.104 61.598,74.077 U1.13
PA4: J1.9 U1.14 | length 11.3
  Top Layer w0.3: J1.9 52.903,73.604 61.364,73.604 61.391,73.577 U1.14
PA5: J1.10 U1.15 | length 12.1
  Top Layer w0.3: J1.10 53.049,70.993 53.557,71.501 58.423,71.501 60.026,73.104 61.157,73.104 61.184,73.077 U1.15
PA6: J1.11 U1.16 | length 13
  Top Layer w0.3: J1.11 54.665,68.453 54.784,68.572 56.201,68.572 60.233,72.604 60.95,72.604 60.977,72.577 U1.16
PA7: J1.12 U1.17 | length 13.8
  Top Layer w0.3: J1.12 54.991,68.072 57.134,68.072 v1(57.221,68.159) ; v1(63.033,72.077) U1.17
  Bottom Layer w0.3: v1(57.221,68.159) 57.221,68.215 60.635,71.629 60.637,71.629 61.112,72.104 63.006,72.104 v1(63.033,72.077)
PA8: J2.16 U1.29 | length 31.5
  Top Layer w0.3: v1(67.263,64.808) 67.263,64.829 67.54,65.106 U1.29 ; v1(68.204,60.393) 68.204,60.325 68.607,59.922 68.607,59.593 68.922,59.277 71.025,59.277 v1(71.12,59.182) ; v1(88.442,56.711) 88.958,56.711 J2.16
  Bottom Layer w0.3: v1(67.263,64.808) 67.263,64.651 67.192,64.58 67.192,63.381 67.318,63.255 67.318,63.166 68.204,62.28 v1(68.204,60.393) ; v1(71.12,59.182) 85.971,59.182 v1(88.442,56.711)
PA9: J2.15 U1.30 | length 30.5
  Top Layer w0.3: v1(67.692,64.373) 67.692,64.551 68.04,64.899 U1.30 ; v1(67.818,63.373) 68.517,63.373 69.406,62.484 v1(70.104,62.484) ; v1(78.105,64.135) 79.248,64.135 v1(79.375,64.008) ; v1(88.265,59.309) 88.9,59.309 J2.15
  Bottom Layer w0.3: v1(67.692,64.373) 67.818,64.247 v1(67.818,63.373) ; v1(70.104,62.484) 71.751,62.484 72.132,62.865 75.057,62.865 76.327,64.135 v1(78.105,64.135) ; v1(79.375,64.008) 81.407,64.008 84.455,60.96 87.716,60.96 88.265,60.411 v1(88.265,59.309)
PA10: J2.14 U1.31 | length 26.6
  Top Layer w0.3: v1(68.54,65.953) U1.31 ; v1(76.962,66.548) 78.105,67.691 78.74,67.691 79.502,66.929 79.502,66.802 83.82,62.484 v1(84.455,61.849) ; v1(87.376,61.849) 88.138,61.849 88.646,61.341 89.307,61.341 90.069,60.579 J2.14
  Bottom Layer w0.3: v1(68.54,65.953) 68.707,65.786 71.755,65.786 72.517,66.548 v1(76.962,66.548) ; v1(84.455,61.849) v1(87.376,61.849)
PA11: J2.13 R9.2 U1.32 | length 38.8
  Top Layer w0.3: R9.2 68.231,51.763 68.326,51.858 v1(68.326,54.102) ; v1(68.704,64.119) 68.704,64.134 69.04,64.47 U1.32 ; v1@68.725,64.135 68.961,64.135 69.662,63.434 69.974,63.434 v1(70.04,63.5) ; v1(75.184,64.008) 75.819,64.643 v1(79.248,64.643) ; v1(85.471,62.865) 88.514,62.865 88.768,63.119 J2.13
  Bottom Layer w0.3: v1(68.326,54.102) 68.793,54.569 68.793,64.029 v1(68.704,64.119) ; v1(70.04,63.5) 74.676,63.5 v1(75.184,64.008) ; v1(79.248,64.643) 79.367,64.524 83.177,64.524 84.836,62.865 v1(85.471,62.865)
PA12: J2.12 R10.2 R11.2 U1.33 | length 36.7
  Top Layer w0.3: R11.2 69.247,51.763 69.342,51.858 v1(69.342,54.356) ; v1(69.54,64.605) U1.33 ; v1(75.819,65.405) v1(79.105,65.405) ; v1(88.065,65.677) 88.083,65.659 J2.12
  Bottom Layer w0.3: v1(69.342,54.356) 69.342,64.407 v1(69.54,64.605) ; v1@69.453,64.516 74.676,64.516 75.568,65.408 75.816,65.408 v1(75.819,65.405) ; v1(79.105,65.405) 79.359,65.659 88.048,65.659 v1(88.065,65.677)
PA15: J2.11 U1.38 | length 19.8
  Top Layer w0.3: U1.38 76.824,69.077 v1(77.47,69.723) ; v1(87.884,69.723) 88.646,69.723 J2.11
  Bottom Layer w0.3: v1(77.47,69.723) 77.47,69.016 77.771,68.715 86.876,68.715 v1(87.884,69.723)
PB0: J1.13 U1.18 | length 14.8
  Top Layer w0.3: J1.13 55.09,65.631 55.614,65.631 57.645,67.662 v1(57.645,67.701) ; v1(63.057,71.577) U1.18
  Bottom Layer w0.3: v1(57.645,67.701) 57.657,67.713 57.657,67.907 57.797,68.046 57.797,68.084 60.842,71.129 60.844,71.129 61.319,71.604 62.597,71.604 62.624,71.577 v1(63.057,71.577)
PB1: J1.14 U1.19 | length 16.4
  Top Layer w0.3: J1.14 54.98,62.981 54.98,64.109 55.504,64.632 58.157,67.286 v1(58.157,67.674) ; v1(63.057,71.077) 63.264,71.077 U1.19
  Bottom Layer w0.3: v1(58.157,67.674) 59.467,68.984 59.467,69.045 61.526,71.104 62.39,71.104 62.417,71.077 v1(63.057,71.077)
PB3: J2.10 U1.39 | length 18.1
  Top Layer w0.3: U1.39 76.562,69.577 v1(77.089,70.104) ; v1(87.503,70.739) J2.10
  Bottom Layer w0.3: v1(77.089,70.104) 77.724,70.739 v1(87.503,70.739)
PB4: J2.9 U1.40 | length 21
  Top Layer w0.3: U1.40 76.173,70.077 v1(76.708,70.612) ; v1(86.995,75.692) 87.757,75.692 J2.9
  Bottom Layer w0.3: v1(76.708,70.612) 81.788,75.692 86.741,75.692 86.744,75.689 86.992,75.689 v1(86.995,75.692)
PB5: J2.8 U1.41 | length 19.7
  Top Layer w0.3: 73.406,70.577 75.853,70.577 v1(76.362,71.085) ; v1(87.63,76.708) 89.281,76.708 J2.8
  Bottom Layer w0.3: v1(76.362,71.085) 81.984,76.708 v1(87.63,76.708)
PB6: J2.7 R15.2 U1.42 U5.14 | length 49.2
  Top Layer w0.3: U1.42 75.646,71.077 v1(76.069,71.5) ; v1(88.392,79.375) 89.154,79.375 J2.7 v1(91.948,78.359) ; v1(93.116,86.37) 93.233,86.487 R15.2 ; U5.14 105.918,87.757 v1(106.299,87.376)
  Bottom Layer w0.3: v1(76.069,71.5) 83.944,79.375 v1(88.392,79.375) ; v1(91.948,78.359) 92.075,78.486 92.075,85.329 v1(93.116,86.37) 105.928,86.37 106.299,86.741 v1(106.299,87.376)
PB7: J2.6 R16.2 U1.43 U5.15 | length 51.1
  Top Layer w0.3: U1.43 75.227,71.577 75.565,71.915 v1(75.565,71.923) ; v1(86.487,81.026) 90.043,81.026 J2.6 91.716,80.899 91.97,80.645 93.218,80.645 93.853,81.28 R16.2 94.435,84.508 v1(94.488,84.455) ; U5.15 103.886,90.17 v1(106.307,90.17)
  Bottom Layer w0.3: v1(75.565,71.923) 84.668,81.026 v1(86.487,81.026) ; v1(94.488,84.455) 94.947,84.455 95.297,84.105 106.838,84.105 107.061,84.328 107.061,87.321 106.307,88.075 v1(106.307,90.17)
PB8: J2.5 U1.45 | length 22.7
  Top Layer w0.3: U1.45 v1(73.729,72.577) ; v1(87.63,84.074) 89.445,84.074 90.08,83.439 J2.5
  Bottom Layer w0.3: v1(73.729,72.577) 78.622,77.47 78.994,77.47 85.598,84.074 v1(87.63,84.074)
PB9: J2.4 U1.46 | length 23
  Top Layer w0.3: U1.46 73.523,73.077 73.724,73.278 v1(73.724,73.374) ; v1(86.995,84.709) 88.265,85.979 J2.4
  Bottom Layer w0.3: v1(73.724,73.374) 85.059,84.709 v1(86.995,84.709)
PB10: J1.15 U1.21 | length 17.9
  Top Layer w0.3: J1.15 52.832,58.547 v1(54.483,60.198) ; v1(56.542,63.854) 58.293,65.604 v1(58.293,65.913) ; v1(61.976,70.104) 62.004,70.076 62.981,70.076 62.982,70.077 U1.21
  Bottom Layer w0.3: v1(54.483,60.198) 54.483,61.595 56.542,63.654 v1(56.542,63.854) ; v1(58.293,65.913) 58.547,65.913 60.515,67.882 60.515,68.679 61.941,70.104 v1(61.976,70.104)
PB11: J1.16 U1.22 | length 19.6
  Top Layer w0.3: J1.16 54.864,57.785 v1(54.864,58.674) ; v1(56.388,61.087) 56.388,62.992 v1(58.928,65.532) ; v1(62.058,69.514) 62.12,69.576 63.056,69.576 63.057,69.577 63.373,69.577 U1.22
  Bottom Layer w0.3: v1(54.864,58.674) 56.388,60.198 v1(56.388,61.087) ; v1(58.928,65.532) 58.928,65.587 61.087,67.746 61.087,68.199 62.058,69.17 v1(62.058,69.514)
PB12: J2.20 U1.25 | length 38.6
  Top Layer w0.3: v1(65.151,64.389) 65.151,66 65.54,66.389 U1.25 ; v1(68.186,57.252) 69.621,57.252 69.715,57.158 70.096,57.158 70.104,57.15 v1(70.342,57.15) ; v1(85.217,50.165) 90.043,45.339 J2.20
  Bottom Layer w0.3: v1(65.151,64.389) 65.151,62.357 66.167,61.341 66.167,59.563 66.699,59.031 66.699,58.008 67.414,57.293 67.818,57.293 67.834,57.277 68.161,57.277 v1(68.186,57.252) ; v1(70.342,57.15) 70.866,57.15 72.644,55.372 80.01,55.372 v1(85.217,50.165)
PB13: J2.19 U1.26 | length 37.4
  Top Layer w0.3: v1(65.659,64.389) 65.659,65.667 66.04,66.048 U1.26 ; v1(68.293,57.785) 68.301,57.777 69.803,57.777 69.922,57.658 v1(70.342,57.658) ; v1(86.959,51.947) 86.959,51.09 J2.19
  Bottom Layer w0.3: v1(65.659,64.389) 65.659,62.738 65.794,62.603 65.794,62.459 66.691,61.562 66.691,59.784 67.199,59.276 67.199,58.215 67.621,57.793 68.191,57.793 68.199,57.785 v1(68.293,57.785) ; v1(70.342,57.658) 81.28,57.658 86.868,52.07 86.868,52.038 v1(86.959,51.947)
PB14: J2.18 U1.27 | length 36
  Top Layer w0.3: v1(66.176,64.425) 66.167,64.434 66.167,65.468 66.54,65.841 U1.27 ; v1(68.229,58.293) 68.492,58.293 68.508,58.277 70.01,58.277 70.113,58.174 v1(70.342,58.174) ; v1(88.138,53.34) 88.138,52.451 J2.18
  Bottom Layer w0.3: v1(66.176,64.425) 66.176,62.983 66.294,62.865 66.294,62.666 67.191,61.769 67.191,59.991 67.699,59.483 67.699,58.469 67.875,58.293 v1(68.229,58.293) ; v1(70.342,58.174) 83.685,58.174 88.138,53.721 v1(88.138,53.34)
PB15: J2.17 U1.28 | length 33.5
  Top Layer w0.3: v1(66.676,64.389) 66.676,64.479 66.763,64.565 66.763,65.357 67.04,65.634 U1.28 ; v1(68.199,58.793) 68.699,58.793 68.715,58.777 70.255,58.777 v1(70.358,58.674) ; v1(88.392,54.316) 88.813,54.316 J2.17
  Bottom Layer w0.3: v1(66.676,64.389) 66.676,63.19 66.794,63.072 66.794,62.873 67.691,61.976 67.691,60.198 68.199,59.69 v1(68.199,58.793) ; v1(70.358,58.674) 83.947,58.674 84.073,58.548 88.138,54.483 88.226,54.483 v1(88.392,54.316)
PC13: J1.2 R5.2 U1.2 | length 40.1
  Top Layer w0.3: J1.2 54.864,91.313 v1(55.245,90.932) ; U1.2 70.54,77.398 v1(71.255,78.113) 71.384,78.113 72.9,76.597 v1(74.422,76.597) ; v1(75.501,77.915) 77.268,77.915 77.293,77.89 79.74,77.89 80.336,78.486 R5.2
  Bottom Layer w0.3: v1(55.245,90.932) 55.245,89.916 61.721,83.44 68.071,83.44 72.202,79.309 72.202,79.06 v1(71.255,78.113) ; v1(74.422,76.597) 74.422,76.835 v1(75.501,77.915)
PC14: C9.1 J1.3 U1.3 Y3.2 | length 36
  Top Layer w0.3: J1.3 54.174,88.773 57.222,85.725 v1(58.039,85.725) ; U1.3 70.04,77.605 70.866,78.431 v1(70.866,78.613) 71.591,78.613 73.107,77.097 74.629,77.097 74.812,76.915 v1@76.021,76.915 ; v1(76.041,76.915) v1@76.021,76.915 ; C9.1 76.021,76.305 v1@76.021,76.915 ; Y3.2@77.47,79.883 77.47,79.502 77.501,79.533 v1(77.501,78.39)
  Bottom Layer w0.3: v1(58.039,85.725) 62.103,81.661 67.818,81.661 v1(70.866,78.613) ; v1(76.041,76.915) 77.501,78.374 v1(77.501,78.39)
PC15: C12.1 J1.4 U1.4 Y3.1 | length 48.4
  Top Layer w0.3: J1.4 56.007,86.233 v1(57.785,84.455) ; U1.4 69.54,77.867 69.977,78.304 69.977,78.313 v1@70.127,78.463 ; v1@70.131,78.459 v1(70.159,78.486) 70.366,78.693 70.366,78.82 70.659,79.113 71.798,79.113 73.314,77.597 75.112,77.597 75.294,77.415 76.437,77.415 76.462,77.39 77.605,77.39 77.809,77.186 77.809,76.777 C12.1@78.259,76.327 ; Y3.1 77.851,84.201 v1(80.518,84.201) ; C12.1 78.456,76.13 79.678,77.352 80.268,77.352 82.931,80.015 82.931,80.518 82.423,81.026 v1(82.423,83.439)
  Bottom Layer w0.3: v1(57.785,84.455) 63.77,78.47 70.143,78.47 v1(70.159,78.486) ; v1(80.518,84.201) 81.661,84.201 v1(82.423,83.439)
R/W: L1.5 U5.5 | length 30.9
  Top Layer w0.3: v1(106.68,61.214) L1.5
  Bottom Layer w0.3: U5.5 96.189,82.677 96.754,82.112 96.754,82.062 102.266,76.55 102.266,74.596 103.378,73.484 103.378,66.366 106.68,63.064 v1(106.68,61.214)
RS: L1.4 U5.4 | length 40.9
  Top Layer w0.3: v1(105.791,60.452) 105.791,59.563 L1.4
  Bottom Layer w0.3: U5.4 94.543,85.217 93.853,84.527 93.853,71.755 93.769,71.671 96.226,69.215 99.822,69.215 103.759,65.278 103.759,64.643 105.664,62.738 105.664,60.579 v1(105.791,60.452)
SWD: C1.2 H1.4 | length 9.4
  Top Layer w0.3: C1.2 68.707,91.186 v1(69.342,91.821) ; v1(72.771,91.821) 73.025,92.075 H1.4
  Bottom Layer w0.3: v1(69.342,91.821) v1(72.771,91.821)
SWDCLK: H1.3@70.485,95.504 U1.37 | length 48.2
  Top Layer w0.3: H1.3@70.485,95.504 70.612,95.377 70.612,91.567 71.628,90.551 76.962,90.551 77.343,90.17 83.058,90.17 84.392,88.836 84.392,77.9 84.216,77.724 81.915,77.724 80.772,76.581 80.772,73.533 78.867,71.628 v1(78.867,70.104) ; U1.37 77.34,68.577 v1(77.978,69.215)
  Bottom Layer w0.3: v1(77.978,69.215) v1(78.867,70.104)
SWDIO: H1.2@67.945,95.504 U1.34 | length 57.2
  Top Layer w0.3: v1(58.801,64.516) 58.801,62.738 59.69,61.849 70.555,61.849 70.731,62.025 70.731,63.828 70.04,64.519 U1.34 ; v1(58.801,82.423) 58.801,86.542 64.842,92.583 66.548,92.583 67.945,93.98 H1.2@67.945,95.504
  Bottom Layer w0.3: v1(58.801,64.516) 56.523,66.794 56.523,80.145 v1(58.801,82.423)
VBAT: J1.1 U1.1 | length 31.2
  Top Layer w0.3: J1.1 53.213,93.472 v1(56.388,93.472) ; U1.1 71.04,77.191 v1(71.32,77.47)
  Bottom Layer w0.3: v1(56.388,93.472) 58.431,93.472 64.484,87.42 64.484,86.564 65.101,85.947 66.327,85.947 72.937,79.336 72.937,79.088 v1(71.32,77.47)
VCC3V3: C1.1 C3.1 C4.1 C6.1 C8.1 C10.1 C11.1 D3.A D3.K H1.1@65.405,95.504 J1.18 J2.1 L1.2 LED1.1 LED2.1 LS1.1 P1.1 P1.2 R2.2 R12.1 R13.1 R14.1 R15.1 R16.1 R17.2 T1.1 U1.9 U1.24 U1.36 U1.48 U2.5 U5.16 | length 246.9
  Top Layer w0.3: J1.18 56.007,50.673 57.301,51.967 57.301,53.856 57.801,54.356 P1.2 59.801,54.356 61.004,53.153 63.433,53.153 64.135,52.451 64.932,52.451 65.108,52.627 65.108,53.856 P1.1@64.862,54.102 ; v1(62.357,62.738) 65.413,62.738 66.548,63.873 ; v1(63.5,91.948) 65.405,93.853 H1.1@65.405,95.504 ; U1.24 63.5,68.577 63.5,66.616 63.031,66.147 62.682,66.147 62.459,65.924 62.459,65.678 62.23,65.678 62.23,64.049 62.406,63.873 66.548,63.873 ; C1.1 65.798,91.313 v1(64.643,91.313) 64.643,90.17 65.786,89.027 LED1.1@65.786,87.249 ; U1.9 67.04,76.835 ; v1(67.437,54.102) P1.1@64.862,54.102 ; v1(67.564,77.089) 67.54,77.065 67.54,77.011 67.364,76.835 67.04,76.835 ; v1(68.385,64.53) 68.379,64.524 68.372,64.524 68.191,64.343 68.191,64.055 68.009,63.873 66.548,63.873 ; v1(70.54,65.024) 70.54,65.594 71.04,66.094 U1.36 72.103,67.089 72.898,66.294 C3.1@72.898,64.897 ; U1.48 U1.48@73.025,74.077 ; C3.1@72.886,64.897 C3.1@72.898,64.897 ; C3.1@72.898,64.388 C3.1@72.898,64.897 ; v1(73.025,75.692) U1.48@73.025,74.077 ; v1(74.168,89.535) 76.2,89.535 76.454,89.281 LED2.1 76.327,87.249 LED1.1@65.786,87.249 ; C6.1@80.398,68.707 79.488,68.707 ; C6.1 80.843,68.509 80.843,66.604 81.153,66.294 84.836,66.294 85.09,66.548 U2.5 C8.1 86.741,66.736 87.249,66.228 87.249,65.786 88.106,64.929 88.106,64.442 R2.2 ; v1(86.995,62.357) 86.868,62.23 86.868,60.833 86.36,60.325 D3.K 84.408,59.008 83.693,58.293 83.693,55.753 84.408,55.038 D3.A 88.345,55.038 v1(88.392,54.991) ; v1(87.122,93.98) 89.789,93.98 J2.1 90.191,93.62 93.091,93.62 ; v1(87.249,64.389) 87.27,64.41 R2.2 ; v1(92.329,53.975) 92.71,53.975 93.345,53.34 LS1.1 105.664,53.34 106.68,52.324 106.68,50.468 107.11,50.038 L1.2 ; T1.1 93.043,66.627 93.043,65.527 91.927,64.41 R2.2 ; R16.1 93.798,85.418 93.346,85.87 92.909,85.87 92.616,86.163 92.616,86.627 93.091,87.102 93.091,87.573 ; R15.1 93.267,87.397 93.091,87.573 ; R14.1 93.267,88.572 93.091,88.748 ; R13.1 93.267,91.461 93.091,91.637 ; v1(94.488,93.599) 94.467,93.62 R12.1 93.091,93.62 ; U5.16 105.715,92.837 105.863,92.689 R17.2 106.668,92.689 106.731,92.626 107.139,92.626 107.315,92.802 v1(107.315,94.234) ; P1.1@64.862,54.102 64.608,54.356 P1.1 64.355,54.102 P1.1@64.862,54.102 ; LED1.1@65.786,87.249 LED1.1 65.659,84.631 65.483,84.455 64.565,84.455 64.389,84.279 64.389,79.375 64.77,78.994 65.81,78.994 C11.1 66.3,78.504 66.3,77.972 67.04,77.232 67.04,76.835 ; C3.1@72.898,64.897 73.257,64.897 73.328,64.968 73.328,65.339 75.926,67.937 77.407,67.937 78.177,68.707 79.488,68.707 ; U1.48@73.025,74.077 74.005,74.077 74.096,73.986 74.224,73.986 74.445,73.765 74.628,73.765 76.546,71.847 76.546,71.649 79.488,68.707 ; 93.091,87.573 93.091,88.748 ; 93.091,88.748 93.091,89.47 92.583,89.978 92.583,90.928 93.091,91.436 93.091,91.637 ; 93.091,91.637 92.739,91.989 92.739,93.12 93.091,93.472 93.091,93.62
  Bottom Layer w0.3: v1(62.357,62.738) 62.357,60.706 67.437,55.626 v1(67.437,54.102) ; v1(63.5,91.948) 64.135,91.313 v1(64.643,91.313) ; v1(67.564,77.089) 68.334,77.859 70.295,77.859 70.82,77.335 70.82,77.263 71.112,76.97 71.747,76.97 v1(73.025,75.692) ; v1(68.385,64.53) 68.385,64.929 68.56,65.105 70.459,65.105 v1(70.54,65.024) ; v1(74.168,89.535) 74.168,91.694 74.803,92.329 77.294,92.329 77.47,92.153 77.47,91.616 77.646,91.44 86.819,91.44 86.995,91.616 86.995,93.853 v1(87.122,93.98) ; v1(86.995,62.357) 87.249,62.611 v1(87.249,64.389) ; v1(88.392,54.991) 89.194,54.991 89.735,54.45 91.854,54.45 v1(92.329,53.975) ; v1(94.488,93.599) 94.501,93.599 94.851,93.949 103.571,93.949 103.759,94.137 103.759,94.185 103.886,94.312 103.886,94.488 104.14,94.742 106.807,94.742 v1(107.315,94.234)
VO: L1.3 T1.2 | length 30.2
  Top Layer w0.3: T1.2 100.457,72.009 101.346,71.12 101.346,64.389 101.473,64.262 101.473,57.707 101.649,57.531 104.902,57.531 105.791,56.642 106.172,56.642 L1.3
pads on no net: L1. U5.7 U5.13

## Polygon pours and split planes (outlines as drawn)
D0 on Top Layer "D0_L01_P000" (solid, remove dead copper, pour order 0): 42.164,32.004 ccw(c43.434,32.004) 43.434,30.734 152.908,30.734 ccw(c152.908,32.004) 154.178,32.004 154.178,124.079 ccw(c152.908,124.079) 152.908,125.349 148.844,125.349 ccw(c148.816,125.349) 148.816,125.377 43.434,125.377 ccw(c43.434,124.107) 42.164,124.107
D0 on Bottom Layer "D0_L02_P001" (solid, remove dead copper, pour order 1): 42.164,32.004 ccw(c43.434,32.004) 43.434,30.734 152.908,30.734 ccw(c152.908,32.004) 154.178,32.004 154.178,124.079 ccw(c152.908,124.079) 152.908,125.349 148.844,125.349 ccw(c148.816,125.349) 148.816,125.377 43.434,125.377 ccw(c43.434,124.107) 42.164,124.107

## Silkscreen, mask and mechanical layers (free items; w line width, h text height)
Mechanical 1:
  the board outline again, w0.254

## Text inside footprints (layer, text, board x,y; h text height)
L1: Top Overlay "16" at 110.796,87.598 h0.5 r90; Top Overlay "1" at 110.796,45.398 h0.5 r90
LS1: Top Overlay "+" at 98.336,51.93 h1.52 r270